# Altium PCB LightStateRF.PcbDoc
Units mil, origin at the board's own origin, x right, y up, seen from the top; angles counter-clockwise.
Board outline 6000 x 4000 mil, 2 copper layers (Top Layer, Bottom Layer); 106 components, 66 nets, 304 pads, 0 vias.
Unrouted connection lines stored in the file: 212.
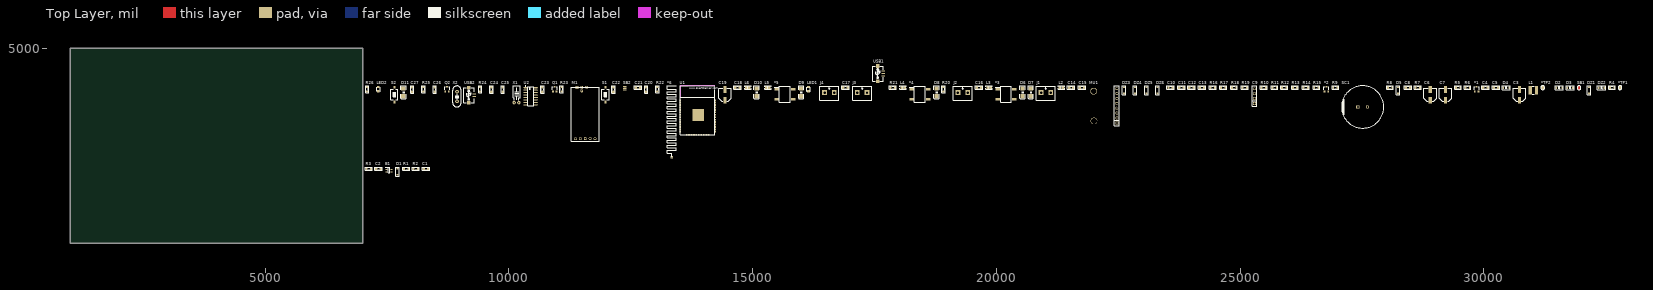
[diagram p0: Top Layer view]
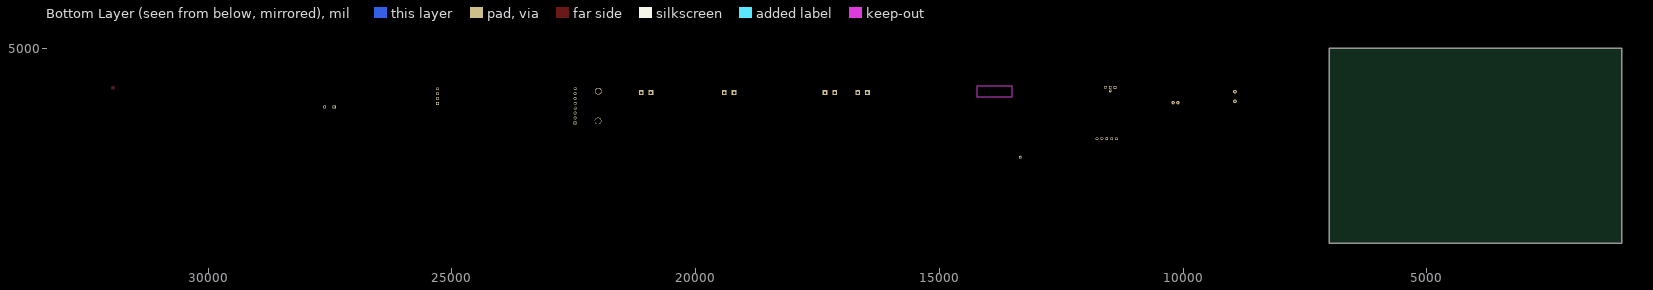
[diagram p1: Bottom Layer view, seen from below]

## Layer stack, top to bottom
Top Solder: solder mask 0.4, Solder Resist, Dk 3.5
Top Layer: signal copper 1.4
Dielectric 1: dielectric 12.6, FR-4, Dk 4.8
Bottom Layer: signal copper 1.4
Bottom Solder: solder mask 0.4, Solder Resist, Dk 3.5

## Board outline
1000,1000 7000,1000 7000,5000 1000,5000

## Design rules (kind name [scope] priority, off if disabled: settings)
Clearance [All] p1: gap=10 ignorepadtopadclearanceinfootprint=FALSE except(0: Arc-Hole Track-Hole SMDPad-Hole THPad-Hole Via-Hole Fill-Hole Poly-Hole Region-Hole Text-Hole)
PolygonConnect [All] p1: connectstyle=Relief reliefconductorwidth=10 reliefentries=4 polygonreliefangle="90 Angle" airgapwidth=10
RoomDefinition LightStateRF [InComponentClass('LightStateRF')] p1: confinementstyle=ConfineIn formatcopy=TRUE lockcomponents=FALSE outline 7045,2365 32980,2365 32980,4340 7045,4340
RoutingVias [All] p1: holewidth=28 width=50 viastyle="Through Hole" minholewidth=28 minwidth=50 maxholewidth=28 maxwidth=50
SolderMaskExpansion [All] p1: expansion=4
Width [All] p1: maxlimit=10 minlimit=10 preferedwidth=10
30 further rules are at their usual default settings.

## Components (designator, comment, footprint, x,y, rotation, side; value= is the part's Value field where it differs from the comment)
*1 "AO3400" SOT23-123 29850,4160 r0 top
*2 "AO3400" SOT23-123 26770,4160 r0 top
*3 "Diode Bridge" "Diode Bridge 1A" 19950,3815 r0 top
*4 "Diode Bridge" "Diode Bridge 1A" 18185,3815 r0 top
*5 "Diode Bridge" "Diode Bridge 1A" 15415,3815 r0 top
*6 "Anten" LOXO_433_NGANG 13365,2710 r90 top
*TP1 "TP" TP 32840,4145 r90 top
*TP2 "TP" TP 31255,4145 r90 top
B1 "MP2315GJ-Z" SOT65P280X100-8N 7540,2500 r0 top
C1 "104" SM-0805 8295,2530 r0 top value=103
C2 "104" SM-0805 7325,2530 r0 top value=103
C3 "47UF 50V" CAP-ALU-SMD-6.3x7.7x2.2 30730,4045 r90 top
C4 "104" SM-0805 30035,4195 r0 top value=103
C5 "104" SM-0805 30245,4195 r0 top value=103
C6 "100uF 25V 6x7MM" CAP-ALU-SMD-6.3x7.7x2.2 28900,4045 r90 top
C7 "100uF 25V 6x7MM" CAP-ALU-SMD-6.3x7.7x2.2 29215,4045 r90 top
C8 "22pF" SM-0805 28445,4195 r0 top value=103
C9 "JP4" JP4-C1T 25295,3870 r90 top
C10 "104" SM-0805 23575,4195 r0 top value=103
C11 "104" SM-0805 23795,4195 r0 top value=103
C12 "104" SM-0805 24000,4195 r0 top value=103
C13 "104" SM-0805 24220,4195 r0 top value=103
C14 "104" SM-0805 21535,4195 r0 top value=103
C15 "104" SM-0805 21755,4195 r0 top value=103
C16 "104" SM-0805 19640,4195 r0 top value=103
C17 "104" SM-0805 16905,4195 r0 top value=103
C18 "104" SM-0805 14690,4195 r0 top value=103
C19 "47UF 50V" CAP-ALU-SMD-6.3x7.7x2.2 14430,4045 r90 top
C20 "104" SM-0805 12815,4155 r90 top value=103
C21 "104" SM-0805 12650,4195 r0 top value=103
C22 "104" SM-0805 12145,4155 r90 top value=103
C23 "104" SM-0805 10685,4155 r90 top value=103
C24 "22" SM-0805 9640,4155 r90 top value=103
C25 "104" SM-0805 9870,4155 r90 top value=103
C26 "22" SM-0805 8475,4155 r90 top value=103
C27 "104" SM-0805 8015,4155 r90 top value=103
D1 "Diode" SOD123 7715,2470 r0 top
D2 "Diode" DIO-SMD-123 31545,4190 r0 top
D3 "Diode" DIO-SMD-123 31770,4190 r0 top
D4 "Diode" DIO-SMD-123 30460,4190 r0 top
D5 "Diode" SOD123 28235,4135 r0 top
D6 "Diode" DIO-SMD-106 20535,4095 r90 top
D7 "Diode" DIO-SMD-106 20705,4095 r90 top
D8 "Diode" DIO-SMD-106 18770,4095 r90 top
D9 "Diode" DIO-SMD-106 15995,4095 r90 top
D10 "Diode" DIO-SMD-106 15080,4095 r90 top
D11 "Diode" DIO-SMD-106 7835,4095 r90 top
DZ1 "ZMM3.6" SOD123 32155,4135 r0 top
DZ2 "ZMM3.6" DIO-SMD-123 32415,4190 r0 top
DZ3 "ZMM3.6" SOD123 22615,4135 r0 top
DZ4 "ZMM3.6" SOD123 22845,4135 r0 top
DZ5 "ZMM3.6" SOD123 23075,4135 r0 top
DZ6 "ZMM3.6" SOD123 23305,4135 r0 top
J1 "KF2" KF2-5.08 21015,4090 r0 top
J2 "KF2" KF2-5.08 19310,4090 r0 top
J3 "KF2" KF2-5.08 17245,4090 r0 top
J4 "KF2" KF2-5.08 16575,4090 r0 top
L1 "4.2uH" "IND 4532-2P" 31015,4140 r0 top
L2 "1.5uH" "FER 0805/2012" 21335,4195 r0 top
L3 "1.5uH" "FER 0805/2012" 19850,4195 r0 top
L4 "1.5uH" "FER 0805/2012" 18085,4195 r0 top
L5 "1.5uH" "FER 0805/2012" 15310,4195 r0 top
L6 "1.5uH" "FER 0805/2012" 14900,4195 r0 top
LED1 "LED" SM-LED-0805-Blue 16145,4115 r90 top
LED2 "LED" SM-LED-0805-Blue 7320,4115 r90 top
M1 "CC1101" "CC1101 UART HC11" 11230,2680 r0 top
MU1 "MPU6050" MPU6050 22175,3690 r90 top
Q1 "2N3904" SOT23-231 10940,4160 r0 top value=C1815
Q2 "2N3904" SOT23-231 8730,4160 r0 top value=C1815
R1 "7.5k" RES-SMD-0805 7895,2530 r0 top
R2 "100k" RES-SMD-0805 8090,2530 r0 top
R3 "20R" RES-SMD-0805 7125,2530 r0 top
R4 "220k" RES-SMD-0805 32630,4195 r0 top
R5 "680R" RES-SMD-0805 29470,4195 r0 top
R6 "680R" RES-SMD-0805 29665,4195 r0 top
R7 "75k" RES-SMD-0805 28645,4195 r0 top
R8 "30k" RES-SMD-0805 28075,4195 r0 top
R9 "24k" RES-SMD-0805 26955,4195 r0 top
R10 "12k" RES-SMD-0805 25485,4195 r0 top
R11 "12k" RES-SMD-0805 25705,4195 r0 top
R12 "12k" RES-SMD-0805 25905,4195 r0 top
R13 "12k" RES-SMD-0805 26125,4195 r0 top
R14 "10k" RES-SMD-0805 26345,4195 r0 top
R15 "10k" RES-SMD-0805 26565,4195 r0 top
R16 "4k7" RES-SMD-0805 24435,4195 r0 top
R17 "4k7" RES-SMD-0805 24655,4195 r0 top
R18 "4k7" RES-SMD-0805 24875,4195 r0 top
R19 "4k7" RES-SMD-0805 25095,4195 r0 top
R20 "12k" RES-SMD-0805 18915,4160 r90 top
R21 "470r" RES-SMD-0805 17875,4195 r0 top
R22 "10k" RES-SMD-0805 13045,4160 r90 top
R23 "12k" RES-SMD-0805 11080,4160 r90 top
R24 "10k" RES-SMD-0805 9410,4160 r90 top
R25 "12k" RES-SMD-0805 8245,4160 r90 top
R26 "470R" RES-SMD-0805 7090,4160 r90 top
S1 "SW" "BUTTON-SMD 2PIN" 11980,4050 r90 top
S2 "SW" "BUTTON-SMD 2PIN" 7650,4050 r90 top
SB1 "SB" SB 31890,4125 r0 top
SB2 "SB_3" SB_3 12425,4115 r90 top
SC1 "SuperCap" SuperCapacitor 27220,3480 r0 top
U1 "ESP32 MODULE" ESP32S 13515,3225 r0 top
U2 "CH340G" SO16 10445,4015 r0 top
USB1 "Port isn't USB" USB-M1 17680,4480.59 r90 top
USB2 "USB_M" USB-M1 9290,4035 r90 top
X1 "32.768" XT32k 10105,3885 r90 top value=4Mhz
X2 "12Mhz" XT2 8935,4010 r90 top value=4Mhz

## Footprints (in the part's own frame and the unit in brackets; to place one, negate y for a bottom-side part, rotate by r counter-clockwise, add the part's x,y. Pads: shape width x height; smd on the part's side, far side on the other; paste and mask are expansions set on the pad)
"BUTTON-SMD 2PIN" [mm] "Switch SMD type"
  rect 1.5x1 smd: 1(-3.8,0) 2(3.8,0)
  silkscreen extent -2.82,-1.85 2.82,1.85, body extent -3.05,-1.85 3.05,1.85, height 2.5
CAP-ALU-SMD-6.3x7.7x2.2 [mm]
  rect 3.5x1.6 smd: 1(-2.8,0) 2(2.8,0)
  silkscreen extent -3.3,-3.3 3.3,3.3, body extent -3.65,-3.3 3.65,3.3, height 7.65
"CC1101 UART HC11" [mm]
  round 1.52 hole 1.02: 1(3.431,11.821) 2(5.971,11.821) 2(9.211,38.551) 3(8.511,11.821) 4(11.051,11.821) 5(13.591,11.821) 6(6.671,38.551)
  rect 1.52x1.52 hole 1.02: 2(4.131,38.551)
  round 1.524 hole 0.762: 6(6.671,36.703)
  silkscreen extent 1.28,10.54 15.75,38.55, body extent 1.27,10.54 15.75,38.55, height 2
DIO-SMD-106 [mil]
  rect 90x90.55 smd: 1(80,0) 2(-80,0)
  silkscreen extent -130,-55 135,55, body extent -99,-50 106,52, height 95
DIO-SMD-123 [mm]
  rect 0.9x1.2 smd: 1(1.524,0) 2(-1.524,0)
  silkscreen extent -2.16,-1.02 2.16,1.02, body extent -1.76,-0.8 1.94,0.8, height 1.25
"Diode Bridge 1A" [mm]
  rect 2.325x1.35 smd: 1(1.885,8.646) 2(1.885,3.546) 3(10.561,3.546) 4(10.561,8.646)
  silkscreen extent 0.72,1.96 9.05,10.24, body extent 1.3,1.96 11.15,10.24, height 2.93
ESP32S [mm] "ESP32S-Module"
  rect 0.9x0.9 smd: 1(0,18.034) 2(0,16.764) 3(0,15.494) 4(0,14.224) 5(0,12.954) 6(0,11.684) 7(0,10.414) 8(0,9.144) 9(0,7.874) 10(0,6.604) 11(0,5.334) 12(0,4.064) 13(0,2.794) 14(0,1.524) 15(3.3,0.034) 16(4.57,0.034) 17(5.84,0.034) 18(7.11,0.034) 19(8.38,0.034) 20(9.65,0.034) 21(10.92,0.034) 22(12.19,0.034) 23(13.46,0.034) 24(14.73,0.034) 25(18.034,1.524) 26(18.034,2.794) 27(18.034,4.064) 28(18.034,5.334) 29(18.034,6.604) 30(18.034,7.874) 31(18.034,9.144) 32(18.034,10.414) 33(18.034,11.684) 34(18.034,12.954) 35(18.034,14.224) 36(18.034,15.494) 37(18.034,16.764) 38(18.034,18.034)
  rect 6x6 smd: 101(9.3,10.3)
  Keep-Out Layer region: 0,19.558 18.034,19.558 18.034,25.527 0,25.527
  silkscreen extent 0,0 18.03,25.53, body extent 0,0 18.03,25.53, height 2
"FER 0805/2012" [mm] "Chip Ferrite, 2-Leads, Body 2.00x1.20mm, IPC Medium Density"
  rect 1.3x1.4 smd: 1(-0.8,0) 2(0.8,0)
  silkscreen extent -1.7,-0.9 1.7,0.9, body extent -1,-0.64 1,0.64, height 1.26
"IND 4532-2P" [mm]
  rect 1.75x4.5 smd: 1(-1.625,0) 2(1.625,0)
  silkscreen extent -0.52,-2 0.52,2, body extent -2.25,-2 2.25,2, height 3.2
JP4-C1T [mm] "4 row, straight, gold plating"
  rect 1.52x1.52 hole 1.02: 1(0,0)
  round 1.52 hole 1.02: 2(2.54,0) 3(5.08,0) 4(7.62,0)
  silkscreen extent -1.52,-1.27 9.14,1.27, body extent -1.52,-1.25 9.14,1.25, height 8.51
KF2-5.08 [mm]
  rect 2.5x2.5 hole 1.3: 1(-2.54,0) 2(2.54,0)
  silkscreen extent -4.95,-4.08 4.95,3.43, body extent -5,-4.07 5,3.43, height 10
LOXO_433_NGANG [mil] "LOXO_433_NGANG"
  round 60 hole 30: 1(55,25)
  silkscreen extent 55,-70 1518,120, body extent 137,-77 1515,127, height 102
MPU6050 [mm]
  rect 1.52x1.52 hole 1.02: 1(-5.588,-7.493)
  round 3.5 hole 3: 2(-4.572,4.445) 2(10.922,4.572)
  round 1.52 hole 1.02: 2(-3.048,-7.493) 3(-0.508,-7.493) 4(2.032,-7.493) 5(4.572,-7.493) 6(7.112,-7.493) 7(9.652,-7.493) 8(12.192,-7.493)
  silkscreen extent -7.11,-8.76 13.71,-6.22, body extent -7.37,-8.76 13.74,7.11, height 14.54
RES-SMD-0805 [mil]
  rect 39.37x55 smd: 1(-45,0) 2(45,0)
  silkscreen extent -70,-34 70,33, body extent -39,-25 39,25, height 31
SB [mm]
  round 0.5 smd: 1(1.095,1.585) 2(2.105,1.645)
  Top Layer region: 0.865,1.611 0.93,1.919 1.114,2.174 1.385,2.334 1.385,2.334 1.388,0.878 1.114,1.04 0.929,1.3 0.865,1.611
  Top Layer region: 2.321,1.612 2.256,1.92 2.072,2.176 1.8,2.335 1.8,2.335 1.803,0.879 2.075,1.042 2.258,1.301 2.321,1.612
  Top Layer lines w0.254: 0.865,1.611 cw(c1.627,1.611) 1.385,2.334 1.388,0.878 cw(c1.629,1.601) 0.867,1.601 ; 2.321,1.612 ccw(c1.559,1.612) 1.8,2.335 1.803,0.879 ccw(c1.561,1.602) 2.323,1.602
  silkscreen extent 0.54,0.58 2.58,2.63
SB_3 [mm]
  rrect50% 0.6x1.7 smd: 1(0.67,1.215) 2(1.605,1.21) 3(2.53,1.21)
SM-0805 [mil] "Compoment SMD 80x50mil"
  rect 50x55 smd: 1(-45,0) 2(45,0)
  silkscreen extent -77,-34 76,33, body extent -40,-25 40,25, height 24
SM-LED-0805-Blue [mil]
  rect 50x55 smd: 1(0,0) 2(90,0)
  silkscreen extent 0,-35 90,35, body extent 5,-25 85,25, height 43
SO16 [mm] "SOIC, 16-Leads, Body 9.90x3.91mm, Pitch 1.27mm, IPC Medium Density"
  oval 2x0.55 smd: 1(-2.7,4.445) 2(-2.7,3.175) 3(-2.7,1.905) 4(-2.7,0.635) 5(-2.7,-0.635) 6(-2.7,-1.905) 7(-2.7,-3.175) 8(-2.7,-4.445) 9(2.7,-4.445) 10(2.7,-3.175) 11(2.7,-1.905) 12(2.7,-0.635) 13(2.7,0.635) 14(2.7,1.905) 15(2.7,3.175) 16(2.7,4.445)
  silkscreen extent -2.82,-4.95 1.55,5.39, body extent -3,-4.95 3,4.95, height 1.4
SOD123 [mm]
  rect 1.02x0.88 smd: 1(0,-1.635) 2(0,1.635)
  silkscreen extent -0.9,-2.34 0.9,2.34, body extent -0.8,-1.85 0.81,1.85, height 1.27
SOT23-123 [mm] "SOT23, 1=bottom-left, 2=top, 3=bottom-right"
  rect 0.9x0.95 smd: 1(-0.95,-1.25) 2(0,1.25)
  rect 0.9x0.95 smd mask+0: 3(0.95,-1.25)
  silkscreen extent -1.3,-0.38 1.3,1.25, body extent -1.52,-1.23 1.48,1.27, height 1.06
SOT23-231 [mm]
  rect 0.9x0.95 smd mask+0: 1(0.95,-1.25)
  rect 0.9x0.95 smd: 2(-0.95,-1.25) 3(0,1.25)
  silkscreen extent -1.3,-0.38 1.3,1.25, body extent -1.52,-1.23 1.48,1.27, height 1.06
SOT65P280X100-8N [mm]
  rect 1.15x0.45 smd: 1(-1.3,0.975) 2(-1.3,0.325) 3(-1.3,-0.325) 4(-1.3,-0.975) 5(1.3,-0.975) 6(1.3,-0.325) 7(1.3,0.325) 8(1.3,0.975)
  silkscreen extent -1.88,-1.45 0.38,1.55, body extent -1.4,-1.45 1.4,1.45, height 1
SuperCapacitor [mm]
  rect 1.725x1.725 hole 1.15: 1(4.953,8.001)
  round 1.725 hole 1.15: 2(9.953,8.001)
  silkscreen extent -3.55,-3 18.45,19, body extent -3.65,-3.06 18.38,18.93, height 7.8
TP [mm]
  round 1.8 smd: 1(1.175,1.195)
  silkscreen extent 0.15,0.17 2.2,2.21
USB-M1 [mil]
  rect 10x70 smd: 1(51.18,0) 2(25.59,0) 3(0,0) 4(-25.59,0) 5(-50,0)
  rect 74.8x74.8 smd: 5(-155.51,116.84) 5(155.51,116.84)
  silkscreen extent -155,-1 155,215, body extent -157,5 158,218, height 107
XT2 [mil] "Footpin for Crystal 2 pin"
  round 75 hole 34: 1(-100,0) 2(100,0)
  silkscreen extent -213,-83 217,90, body extent -216,-87 216,90, height 144
XT32k [mm]
  round 1.8 hole 0.813: 1(0,0) 2(0,-2.54)
  silkscreen extent 1.27,-3.17 8.76,0.51, body extent -0.15,-2.42 8.2,-0.12, height 1.95

## Part data
B1: "Switching Voltage Regulators 3A 24V 500kHz Sync buck", Manufacturer_Name="Monolithic Power Systems (MPS)", Arrow Part Number=MP2315GJ-Z, Datasheet Link=https://componentsearchengine.com/Datasheets/1/MP2315GJ-Z.pdf, Geometry.Height=1mm, Manufacturer_Part_Number=MP2315GJ-Z
C1 C2 C4 C5 C8 C10 C11 C12 C13 C14 C15 C16 C17 C18 C20 C21 C22 C23 C24 C25 C26 C27: library part CM, "Cap SMD"
C3 C19: library part CN-ALU-SMD, "T? Nhôm 47UF 50V 6.3x5.5MM", LatestRevisionDate=17-Jul-2002, LatestRevisionNote="Re-released for DXP Platform.", PackageReference=POLAR0.8, Published=8-Jun-2000, Publisher="Altium Limited"
C6 C7: library part CN-ALU-SMD, "Polarized Capacitor (Axial)", LatestRevisionDate=17-Jul-2002, LatestRevisionNote="Re-released for DXP Platform.", PackageReference=POLAR0.8, Published=8-Jun-2000, Publisher="Altium Limited"
C9: "WR-PHD 2.54 mm Angled Socket Header", Manufacturer="W¨¹rth Elektronik eiSos GmbH", partNo=613004143121, ComponentLink1 Description=Manufacturer, ComponentLink1URL=http://www.we-online.com, ComponentLink2 Description=Datasheet, ComponentLink2URL=http://katalog.we-online.de/em/datasheet/6130xx143121.pdf, Created by="Karrer Zheng", Created Date="29 March 2013", NoPins=04
DZ1 DZ2 DZ3 DZ4 DZ5 DZ6: library part "DIODE Zener", "DIODE GEN PURP 75V 200MA LLDS"
J1 J2 J3 J4: Manufacturer="Würth Elektronik eiSos GmbH", partNo=691103110002, ComponentLink1 Description=Manufacturer, ComponentLink1URL=http://www.we-online.com, ComponentLink2 Description=Datasheet, ComponentLink2URL=http://katalog.we-online.de/em/datasheet/6911031100xx.pdf, Created by="Karrer Zheng", Created Date="29 October 2013", NoPins=2
L1: library part "INDUCTOR B"
L2 L3 L4 L5 L6: library part Inductor, "SMT Inductor"
M1: library part "CC1101 UART HC11", "OBIT TEAM / CC1101 UART 433MHZ"
MU1: Manufacturer="W¨¹rth Elektronik eiSos GmbH", partNo=613004143121, ComponentLink1 Description=Manufacturer, ComponentLink1URL=http://www.we-online.com, ComponentLink2 Description=Datasheet, ComponentLink2URL=http://katalog.we-online.de/em/datasheet/6130xx143121.pdf, Created by="Karrer Zheng", Created Date="29 March 2013", NoPins=04
Q1 Q2: "NPN 600mW, ECB", =C2383
R1 R2 R3 R4 R5 R6 R7 R8 R9 R10 R11 R12 R13 R14 R15 R16 R17 R18 R19 R20 R21 R22 R23 R24 R25 R26: library part R, "Resistor R1/4W"
S1 S2: library part SW-Button, "Switch-Button", LatestRevisionDate=17-Jul-2002, LatestRevisionNote="Re-released for DXP Platform.", PackageReference=SPST-2, Published=24-Mar-1999, Publisher="Altium Limited"
SC1: library part "5.5V 0.22F"
U2: "High and Low Side Driver", ComponentLink1Description="Manufacturer Link", ComponentLink1URL=http://www.irf.com/, ComponentLink2Description=Datasheet, ComponentLink2URL=http://www.irf.com/product-info/datasheets/data/ir2110.pdf, DatasheetVersion=PD60147J, LatestRevisionDate=04-Mar-2005, LatestRevisionNote="Stylized 3D Model Added.", Note="Pins 4, 8 and 14 are not connected", PackageDescription="DIP; 14 Leads; Row Spacing 7.62 mm; Pitch 2.54 mm", PackageReference=PDIP14, Published=8-Jun-2000, Publisher="Altium Limited"
USB1: library part USB_M
X1 X2: library part XT2, "Crystal, 32.768 KHz, -40 to 85 degC, 3.2 x 1.5 x 0.9 mm SMD"

## Nets (pads, with @x,y where several pads share a name; then routed paths per layer and width w, separated by ;. In a path a pad name is that pad's centre, name@x,y a point inside that pad or via, vN(x,y) a via of type N, cw(c..) or ccw(c..) an arc to the next point about the centre after c; other vN are vias at no path point)
3V3: *1.2 C5.2 C7.1 C9.1 C14.2 C15.2 C20.2 C21.2 D3.2 D4.2 DZ1.2 DZ2.2 M1.1 MU1.1 R14.2 R15.2 R21.2 R22.2 R24.1 SB1.2 U1.2
4V: *TP2.1 C4.2 C6.1 C8.2 D2.1 L1.2 R5.1 R6.1 R7.1
5V: D1.1 D10.2 D11.2 U2.16
ADC_POWER: C13.2 DZ6.2 R13.2 R19.1 U1.7
DTR: Q2.1 R23.2 U2.13
EN: C22.1 Q1.3 R22.1 S1.2 SB2.1 U1.3
ESP32_RX: M1.4 U1.27
ESP32_TX: M1.3 U1.28
ESP_RX: U1.34 U2.2
ESP_TX: U1.35 U2.3
GND: B1.4 C1.2 C3.2 C4.1 C5.1 C6.2 C7.2 C9.3 C10.1 C11.1 C12.1 C13.1 C14.1 C15.1 C20.1 C21.1 C22.2 C23.2 C24.2 C25.2 C26.2 C27.1 DZ1.1 DZ2.1 DZ3.1 DZ4.1 DZ5.1 DZ6.1 L6.1 M1.2 MU1.2 R1.2 R9.2 R16.2 R17.2 R18.2 R19.2 R20.1 R26.2 S1.1 S2.2 SC1.2 U1.1 U1.101 U2.1 USB1.5 USB2.5
"GND IN": *3.2 *4.2 *5.2 C16.1 C17.1 C18.1 C19.2 J4.1 L6.2
GREEN: D6.1 L3.2 R12.1
IO0: C27.2 Q2.3 R24.2 S2.1 SB2.3 U1.25
IO2: LED2.1 U1.24
IO13: U1.16
IO15: U1.23
Net*1_1: *1.1 *1.3 *2.2 D4.1 D5.2 SC1.1
Net*2_1: *2.1 *2.3 D5.1 R5.2 R6.2
Net*3_1: *3.1 C16.2 L3.1
Net*3_3: *3.3 J1.1
Net*3_4: *3.4 J1.2
Net*4_1: *4.1 C17.2 L4.1
Net*4_3: *4.3 J2.1
Net*4_4: *4.4 J2.2
Net*5_1: *5.1 C18.2 L5.1
Net*5_3: *5.3 J3.1
Net*5_4: *5.4 J3.2
Net*6_1: *6.1 M1.6
NetB1_1: B1.1 R1.1 R2.2
NetB1_3: B1.3 C2.1 L1.1
NetB1_5: B1.5 R3.2
NetB1_6: B1.6 R4.2
NetB1_7: B1.7 C1.1 R2.1
NetB1_8: B1.8 R8.1
NetC2_2: C2.2 R3.1
NetC8_1: C8.1 R7.2 R8.2 R9.1
NetC19_1: C19.1 D6.2 D7.2 D8.2 D9.2 L2.1
NetC23_1: C23.1 U1.8 X1.2
NetC24_1: C24.1 U2.7 X2.2
NetC25_1: C25.1 U1.9 X1.1
NetC26_1: C26.1 U2.8 X2.1
NetD2_2: D2.2 D3.1 SB1.1
NetD10_1: D10.1 USB1.1
NetD11_1: D11.1 USB2.1
NetLED1_1: LED1.1 R21.1
NetLED2_2: LED2.2 R26.1
NetM1_5: M1.5 SB2.2
NetQ1_2: Q1.2 R23.1
NetQ2_2: Q2.2 R25.1
NetU2_5: U2.5 USB2.3
NetU2_6: U2.6 USB2.2
OBIT_PROTOCOL_DT: R20.2 U1.12 USB1.4
OBIT_PROTOCOL_RX: U1.14 USB1.2
OBIT_PROTOCOL_TX: U1.13 USB1.3
ORANGE: D8.1 L4.2 R11.1
RED: D9.1 L5.2 R10.1
RTS: Q1.1 R25.2 U2.14
SCL: C9.4 MU1.3 R14.1 U1.36
SDA: C9.2 MU1.4 R15.1 U1.33
STATUS_ESP: LED1.2 U1.29
STATUS_GREEN: C12.2 DZ5.2 R12.2 R18.1 U1.5
STATUS_ORANGE: C11.2 DZ4.2 R11.2 R17.1 U1.6
STATUS_RED: C10.2 DZ3.2 R10.2 R16.1 U1.4
V_BUCK: *TP1.1 B1.2 C3.1 D1.2 L2.2 R4.1 R13.1
"VCC IN": D7.1 J4.2
pads on no net: MU1.5 MU1.6 MU1.7 MU1.8 U1.10 U1.11 U1.15 U1.17 U1.18 U1.19 U1.20 U1.21 U1.22 U1.26 U1.30 U1.31 U1.32 U1.37 U1.38 U2.4 U2.9 U2.10 U2.11 U2.12 U2.15 USB2.4

## Text inside footprints (layer, text, board x,y; h text height)
U1: Top Overlay "www.EvertDekker.com" at 13700,4155 h19.68